# EAGLE board placa3 (EAGLE 7.3.0)
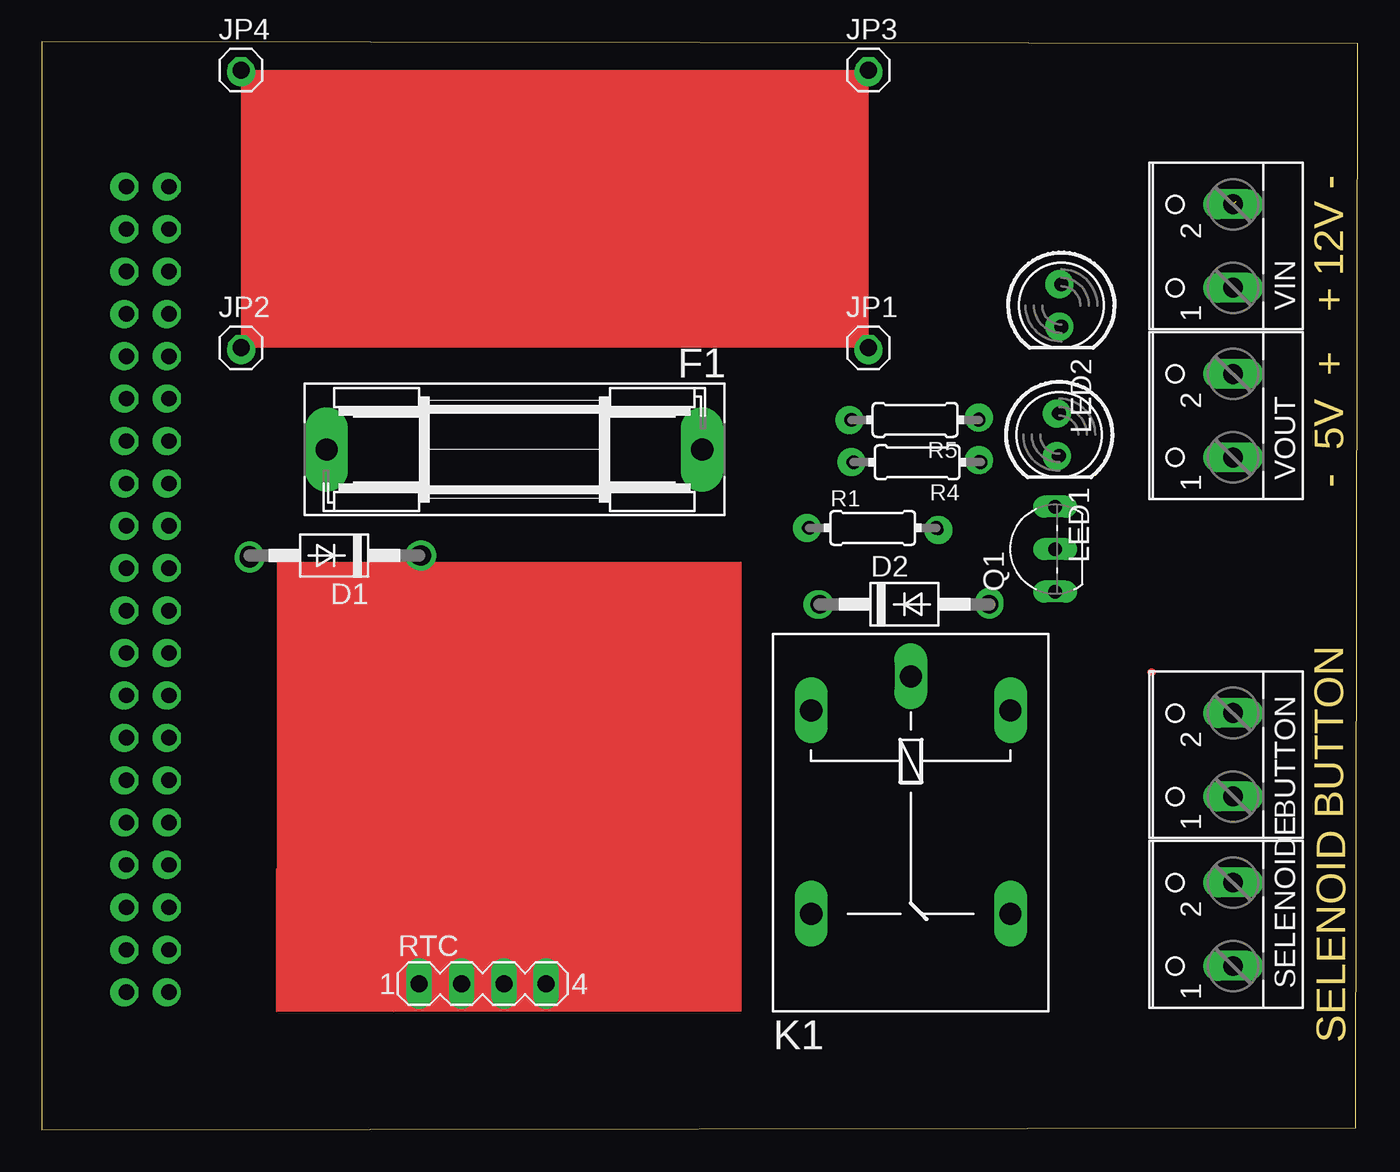
[diagram p0: board, top side]
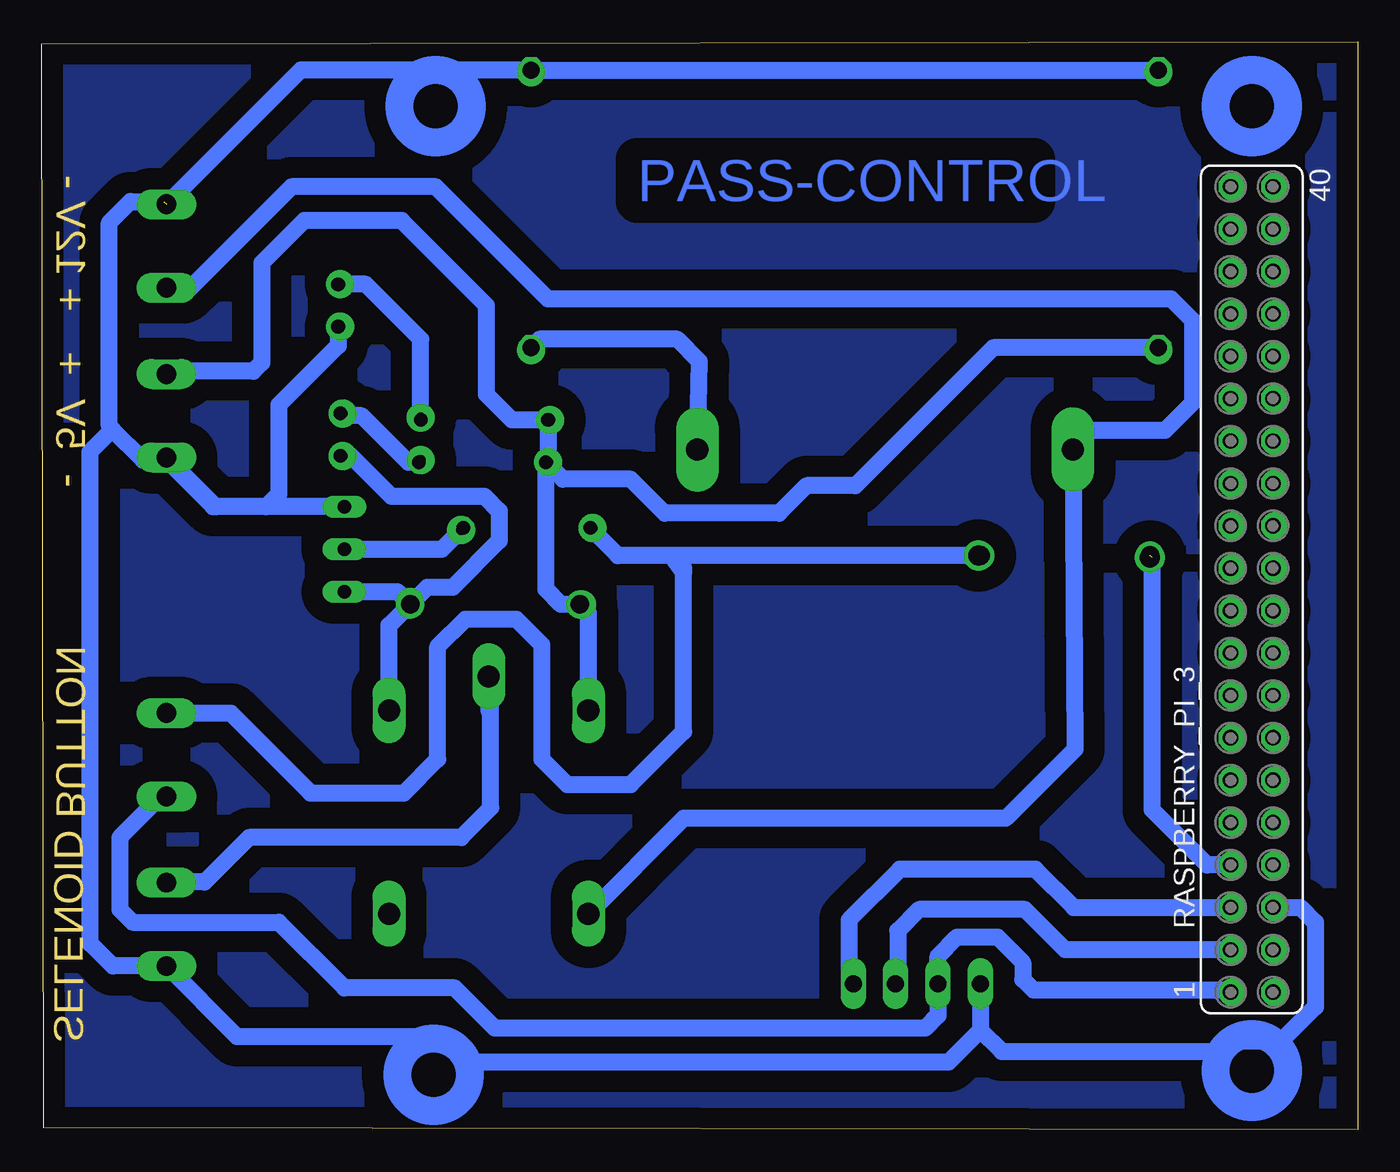
[diagram p1: board, bottom side, seen from below]

Size 78.85 x 65.2 mm. Coordinates in mm from the lower left corner, seen from the top.
Outline: 0,0 78.72,0.13 78.85,65.08 0,65.2 0,0
Copper layers (1*16): Top 0.035mm / dielectric 1.5mm / Bottom 0.035mm
Design rules "default": minimum track width 10mil, minimum drill 24mil, track to track 8mil, track to pad 8mil, pad to pad 8mil, via to via 8mil, smd to smd 8mil, copper to edge 40mil, drill to drill 8mil, minimum pad ring 10mil, minimum via ring 8mil, stop-mask expansion 4mil, vias tented up to drill 0mil, thermal gap 10mil

## Footprints (pad centres in the part's own frame; a part is rotated, then mirrored left to right if it is on the bottom)
W237-102 = drill 1.194 long: 1 -2.5,-1.27; 2 2.5,-1.27
DO41-10 = drill 1.118: A 5.08,0; C -5.08,0
SH22,5 = drill 1.321 pad 2.54 long: 1 -11.252,0; 2 11.252,0
1X01 = drill 1.016 octagon: 1 0,0
G5LE = drill 1.321 long: 1 -7.493,-5.969; 2 -7.493,5.969; O 4.699,5.969; P -9.525,0; S 4.699,-5.969
LED5MM = drill 0.813 octagon: A -1.27,0; K 1.27,0
TO92-EBC = drill 0.813 long: B 0,-1.27; C -2.54,-1.27; E 2.54,-1.27
0204/7 = drill 0.813 octagon: 1 -3.81,0; 2 3.81,0
FE20-2 = drill 0.914: 1 -24.13,1.27 | drill 0.914 octagon: 2 -24.13,-1.27; 3 -21.59,1.27; 4 -21.59,-1.27; 5 -19.05,1.27; 6 -19.05,-1.27; 7 -16.51,1.27; 8 -16.51,-1.27; 9 -13.97,1.27; 10 -13.97,-1.27; 11 -11.43,1.27; 12 -11.43,-1.27; 13 -8.89,1.27; 14 -8.89,-1.27; 15 -6.35,1.27; 16 -6.35,-1.27; 17 -3.81,1.27; 18 -3.81,-1.27; 19 -1.27,1.27; 20 -1.27,-1.27; 21 1.27,1.27; 22 1.27,-1.27; 23 3.81,1.27; 24 3.81,-1.27; 25 6.35,1.27; 26 6.35,-1.27; 27 8.89,1.27; 28 8.89,-1.27; 29 11.43,1.27; 30 11.43,-1.27; 31 13.97,1.27; 32 13.97,-1.27; 33 16.51,1.27; 34 16.51,-1.27; 35 19.05,1.27; 36 19.05,-1.27; 37 21.59,1.27; 38 21.59,-1.27; 39 24.13,1.27; 40 24.13,-1.27
MA04-1 = drill 1.016 long: 1 -3.81,0; 2 -1.27,0; 3 1.27,0; 4 3.81,0

## Placement (x,y rotation side)
BUTTON  [W237-102]  70.1,22.48 90 top
D1  1N4004  [DO41-10]  17.53,34.42 180 top
D2  1N4004  [DO41-10]  51.69,31.5 0 top
F1  [SH22,5]  28.32,40.77 180 top
JP1  [1X01]  49.53,46.86 0 top
JP2  [1X01]  11.94,46.86 0 top
JP3  [1X01]  49.53,63.5 0 top
JP4  [1X01]  11.94,63.5 0 top
K1  G5L  [G5LE]  52.07,17.65 270 top
LED1  [LED5MM]  60.96,41.66 270 top
LED2  [LED5MM]  61.09,49.4 270 top
Q1  BC548  [TO92-EBC]  59.44,34.8 90 top
R1  [0204/7]  49.78,36.07 0 top
R4  220  [0204/7]  52.45,40.01 180 top
R5  220  [0204/7]  52.32,42.55 180 top
RASPBERRY_PI_3  [FE20-2]  6.35,32.38 90 bottom
RTC  [MA04-1]  26.42,8.76 0 top
SELENOIDE  [W237-102]  70.1,12.32 90 top
VIN  [W237-102]  70.1,52.96 90 top
VOUT  +  [W237-102]  70.1,42.8 90 top

## Library data of the parts
BUTTON SELENOIDE VIN VOUT = con-wago-500; MPN: 237-102; OC_FARNELL: unknown; OC_NEWARK: 70K9898
D1 D2 = diode
F1 = fuse; MF: SCHURTER; MPN: 0031.8201; OC_FARNELL: 1162740; OC_NEWARK: 96F8317
JP1-JP4 = pinhead
K1 = relay; OC_FARNELL: unknown; OC_NEWARK: unknown
LED1 LED2 = led
Q1 = transistor-npn
R1 R4 R5 = resistor
RASPBERRY_PI_3 = con-lsta; OC_FARNELL: unknown; OC_NEWARK: unknown
RTC = con-lstb; OC_FARNELL: unknown; OC_NEWARK: unknown

## Nets
3.3V: BUTTON.1 RASPBERRY_PI_3.1 RTC.2
5V: D2.C JP2.1 K1.1 R4.2 R5.2 VOUT.2
GND: JP3.1 JP4.1 LED2.K Q1.E RASPBERRY_PI_3.6 RTC.1 SELENOIDE.1 VIN.2 VOUT.1
GPIO02: RASPBERRY_PI_3.3 RTC.3
GPIO03: RASPBERRY_PI_3.5 RTC.4
GPIO04: D1.A RASPBERRY_PI_3.7
N$1: BUTTON.2 D1.C R1.1
N$4: Q1.B R1.2
N$5: K1.P SELENOIDE.2
N$6: D2.A K1.2 LED1.K Q1.C
N$7: LED2.A R5.1
N$9: F1.2 K1.S VIN.1
N$10: F1.1 JP1.1
N$82: LED1.A R4.1

## Tracks (layer width: path | path; a pad name or v marks a point on that pad's centre or on a via)
3.3V
  Bottom 1.016: RASPBERRY_PI_3.1 7.75,8.38 19.43,8.38 20.07,9.02 20.07,10.03 21.59,11.56 24,11.56 25.15,10.41 RTC.2 25.15,6.86 25.91,6.1 51.69,6.1 54.1,8.51 60.71,8.51 60.83,8.64 64.64,12.45 73.41,12.45 74.17,13.21 74.17,17.53 71.72,19.98 BUTTON.1
5V
  Bottom 1.016: K1.1 46.1,30.99 D2.C 47.75,31.5 48.64,32.38 R4.2 | R4.2 48.51,40.13 R5.2 50.67,42.55 52.2,44.07 52.2,49.4 57.28,54.48 63.12,54.48 65.66,51.94 65.66,45.97 66.17,45.47 71.21,45.47 VOUT.2 | JP2.1 21.84,46.86 30.1,38.61 33.02,38.61 34.67,36.96 41.53,36.96 43.56,38.99 47.62,38.99 R4.2
GND  (via drill 0.6 pad 1.68)  (1 unrouted)
  Bottom 1.016: Q1.E 65.41,37.34 | 65.41,37.34 68.41,37.34 | 68.41,37.34 VOUT.1 | LED2.K 61.09,46.99 64.64,43.43 64.64,38.1 65.41,37.34 | 68.41,37.34 68.58,37.34 71.37,40.13 72.77,40.13 74.61,41.97 | 74.61,41.97 74.8,42.16 74.8,54.36 73.53,55.63 71.54,55.63 | 74.61,41.97 75.95,40.64 75.95,11.18 74.59,9.82 SELENOIDE.1 67.14,5.59 54.86,5.59 53.34,4.06 24.51,4.06 22.61,5.97 | RTC.1 22.61,5.97 | JP4.1 JP3.1 63.33,63.5 VIN.2 | 22.61,5.97 21.34,4.7 7.87,4.7 7.87,5.33 4.57,5.33 2.54,7.37 2.54,12.45 3.43,13.34 v4.95,13.34 RASPBERRY_PI_3.6
GPIO02
  Bottom 1.016: RTC.3 27.56,8.89 27.56,11.94 26.29,13.21 19.94,13.21 17.53,10.8 RASPBERRY_PI_3.3
GPIO03
  Bottom 1.016: RTC.4 30.48,9.02 30.48,12.57 27.43,15.62 19.3,15.62 17.02,13.34 RASPBERRY_PI_3.5
GPIO04  (1 unrouted)
  Bottom 1.016: 12.32,34.29 12.32,19.18 9.02,15.88 RASPBERRY_PI_3.7
N$1  (via drill 1.2 pad 1.78)
  Bottom 1.016: BUTTON.2 67.52,24.98 62.74,20.19 57.15,20.19 55.12,22.23 55.12,28.96 53.47,30.61 50.42,30.61 48.9,29.08 48.9,22.23 47.37,20.7 43.56,20.7 40.39,23.88 40.39,33.4 | 40.39,33.4 40.39,33.66 41.15,34.42 | D1.C v22.73,34.42 41.15,34.42 | 41.15,34.42 40.39,33.4 | 41.15,34.42 44.32,34.42 R1.1
N$2  (via drill 0.6 pad 1.68)
  other vias: 46.48,31.5
N$3  (via drill 0.6 pad 1.68)
  other vias: 56.77,31.62
N$4  (via drill 0.6 pad 1.68)
  Bottom 1.016: Q1.B 54.86,34.8 v53.72,35.94 R1.2
N$5
  Bottom 1.016: K1.P 52.07,26.29 | 52.07,26.29 52.07,25.15 | SELENOIDE.2 71.33,14.86 69.09,14.86 66.42,17.53 53.72,17.53 51.94,19.3 51.94,26.16 52.07,26.29
N$6  (via drill 0.6 pad 1.68)
  Bottom 1.016: Q1.C 57.53,32.26 D2.A | K1.2 58.04,30.23 D2.A | LED1.K v60.83,40.39 60.33,40.39 57.91,37.97 52.32,37.97 51.44,37.08 51.44,35.31 54.23,32.51 55.75,32.51 D2.A
N$7  (via drill 0.6 pad 1.68)
  Bottom 1.016: R5.1 v56.13,42.67 56.13,47.37 59.44,50.67 v60.96,50.67 LED2.A
N$8
  Top 0.406: 66.55,27.43 66.42,27.43
N$9
  Bottom 1.016: K1.S 40.39,18.67 21.08,18.67 16.94,22.81 F1.2 16.82,41.91 11.56,41.91 9.91,43.56 9.91,48.51 11.18,49.78 48.51,49.78 55.24,56.52 63.88,56.52 69.94,50.46 VIN.1
N$10
  Bottom 1.016: F1.1 39.45,46.05 40.77,47.37 49.02,47.37 JP1.1
N$11  (via drill 1.2 pad 1.78)
  other vias: 12.45,34.29
N$14  (via drill 0.6 pad 1.68)
  other vias: 45.85,36.07
N$15  (via drill 0.6 pad 1.68)
  other vias: 48.51,40.01
N$16
  pour Bottom (isolate 1.27): 0,65.15 79.38,65.15 79.38,-0.51 0,-0.51
N$17  (via drill 0.6 pad 1.68)
  other vias: 48.39,42.55
N$18  (via drill 0.6 pad 1.68)
  other vias: 56.13,40.13
N$19  (via drill 0.6 pad 1.68)
  other vias: 60.96,48.13
N$20  (via drill 0.6 pad 1.68)
  other vias: 60.83,42.93
N$21  (via drill 0.6 pad 1.68)
  other vias: 11.94,63.37
N$22  (via drill 0.6 pad 1.68)
  other vias: 11.94,46.74
N$23  (via drill 0.6 pad 1.68)
  other vias: 49.53,46.74
N$24  (via drill 0.6 pad 1.68)
  other vias: 49.53,63.37
N$25  (via drill 0.6 pad 1.68)
  other vias: 4.95,10.8
N$26  (via drill 0.6 pad 1.68)
  other vias: 4.95,8.25
N$27  (via drill 0.6 pad 1.68)
  other vias: 7.49,8.25
N$28  (via drill 0.6 pad 1.68)
  other vias: 7.49,10.8
N$29  (via drill 0.6 pad 1.68)
  other vias: 7.49,13.34
N$30  (via drill 0.6 pad 1.68)
  other vias: 7.49,15.88
N$31  (via drill 0.6 pad 1.68)
  other vias: 4.95,15.88
N$32  (via drill 0.6 pad 1.68)
  other vias: 4.95,18.41
N$33  (via drill 0.6 pad 1.68)
  other vias: 7.49,18.41
N$34  (via drill 0.6 pad 1.68)
  other vias: 4.95,20.96
N$35  (via drill 0.6 pad 1.68)
  other vias: 7.49,20.96
N$36  (via drill 0.6 pad 1.68)
  other vias: 4.95,23.5
N$37  (via drill 0.6 pad 1.68)
  other vias: 7.49,23.5
N$38  (via drill 0.6 pad 1.68)
  other vias: 7.49,26.04
N$39  (via drill 0.6 pad 1.68)
  other vias: 4.95,26.04
N$40  (via drill 0.6 pad 1.68)
  other vias: 4.95,28.58
N$41  (via drill 0.6 pad 1.68)
  other vias: 7.49,28.58
N$42  (via drill 0.6 pad 1.68)
  other vias: 4.95,31.12
N$43  (via drill 0.6 pad 1.68)
  other vias: 7.49,31.12
N$44  (via drill 0.6 pad 1.68)
  other vias: 4.95,33.66
N$45  (via drill 0.6 pad 1.68)
  other vias: 7.49,33.66
N$46  (via drill 0.6 pad 1.68)
  other vias: 7.49,36.2
N$47  (via drill 0.6 pad 1.68)
  other vias: 4.95,36.2
N$48  (via drill 0.6 pad 1.68)
  other vias: 4.95,38.73
N$49  (via drill 0.6 pad 1.68)
  other vias: 7.49,38.73
N$50  (via drill 0.6 pad 1.68)
  other vias: 4.95,41.27
N$51  (via drill 0.6 pad 1.68)
  other vias: 7.49,41.27
N$52  (via drill 0.6 pad 1.68)
  other vias: 7.49,43.81
N$53  (via drill 0.6 pad 1.68)
  other vias: 4.95,43.81
N$54  (via drill 0.6 pad 1.68)
  other vias: 4.95,46.36
N$55  (via drill 0.6 pad 1.68)
  other vias: 7.49,46.36
N$56  (via drill 0.6 pad 1.68)
  other vias: 4.95,48.9
N$57  (via drill 0.6 pad 1.68)
  other vias: 7.49,48.9
N$58  (via drill 0.6 pad 1.68)
  other vias: 4.95,51.44
N$59  (via drill 0.6 pad 1.68)
  other vias: 7.49,51.44
N$60  (via drill 0.6 pad 1.68)
  other vias: 4.95,53.98
N$61  (via drill 0.6 pad 1.68)
  other vias: 7.49,53.98
N$62  (via drill 0.6 pad 1.68)
  other vias: 4.95,56.52
N$63  (via drill 0.6 pad 1.68)
  other vias: 7.49,56.52
N$82
  Bottom 1.016: R4.1 56.9,40.01 59.69,42.8 60.83,42.8 LED1.A
(copper drawn outside any net)
  shapes: Bottom circle x4, Top area x3

## Text on the board
Bottom: PASS-CONTROL
Dimension: + 12V - | - 5V + | BUTTON | SELENOID